# Altium PCB PowerProtect.PcbDoc
Units mil, origin at the board's own origin, x right, y up, seen from the top; angles counter-clockwise.
Board outline 6000 x 4000 mil, 2 copper layers (Top Layer, Bottom Layer); 20 components, 16 nets, 53 pads, 4 vias.
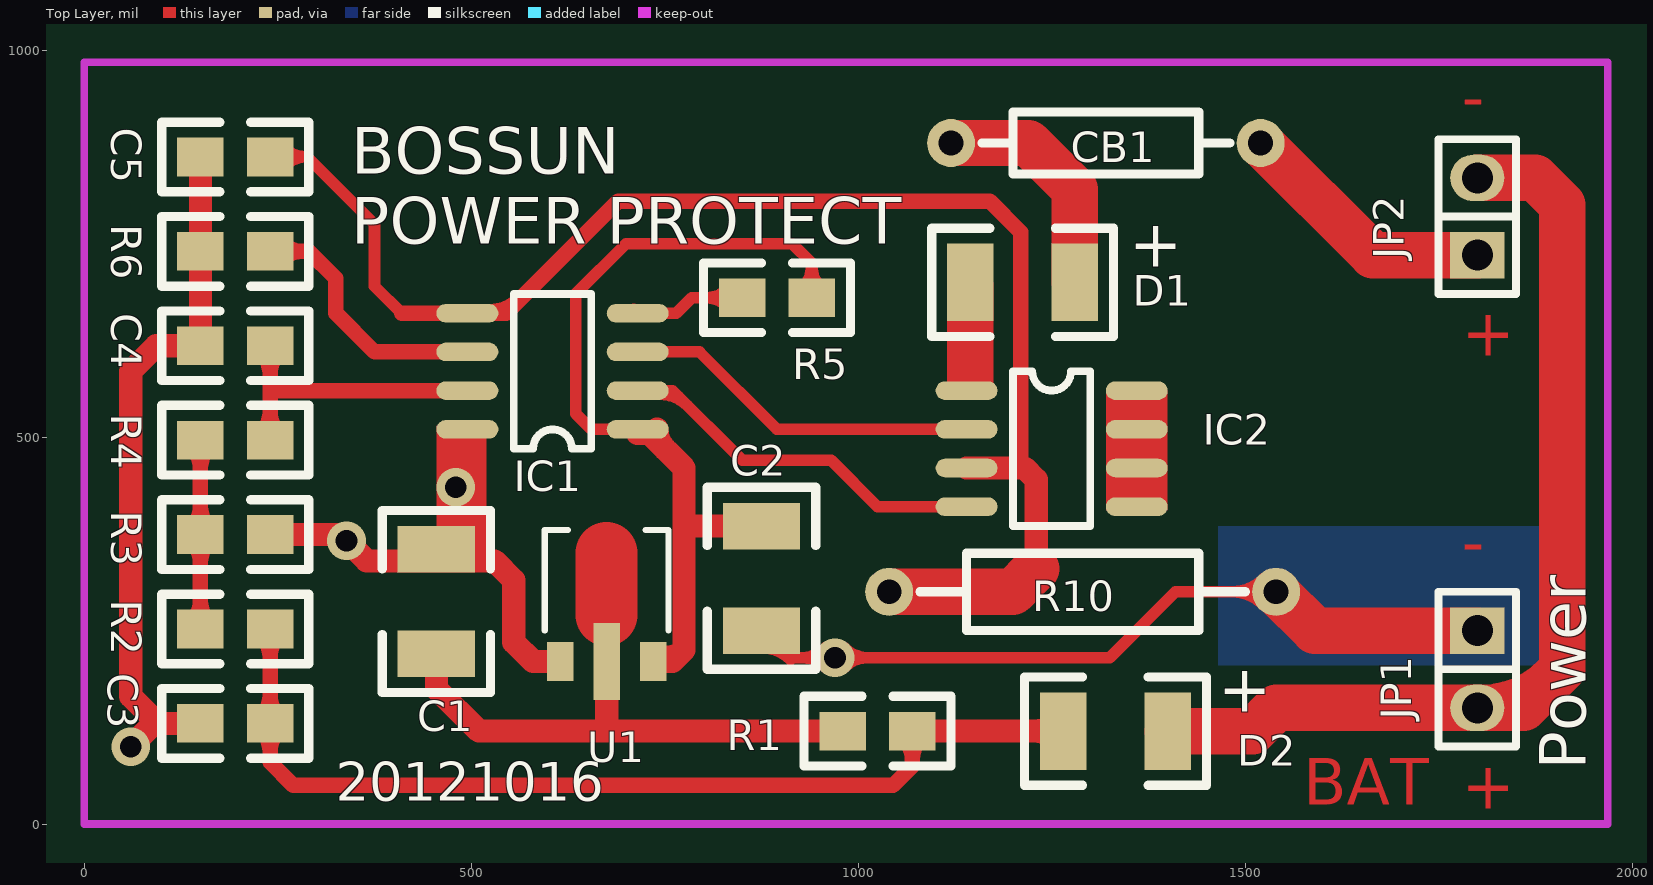
[diagram p0: Top Layer view]
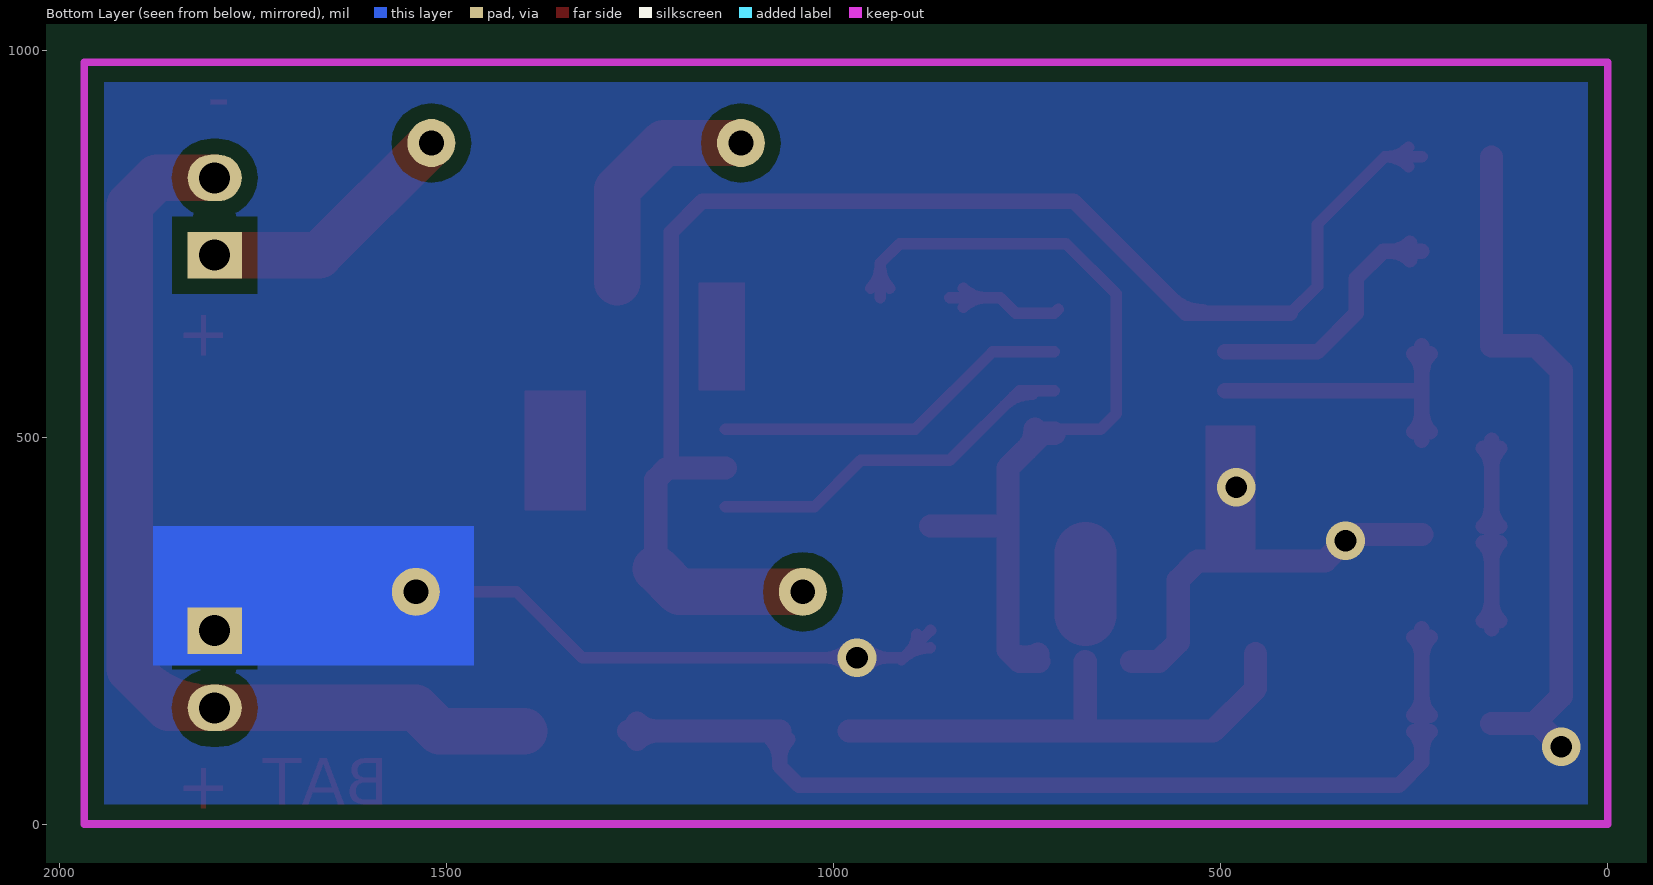
[diagram p1: Bottom Layer view, seen from below]

## Layer stack, top to bottom
Top Layer: signal copper 1.4
Dielectric: dielectric 12.6, FR-4, Dk 4.8
Bottom Layer: signal copper 1.4

## Board outline
-900,-700 5100,-700 5100,3300 -900,3300

## Design rules (kind name [scope] priority, off if disabled: settings)
Clearance Clearance_1 [(InPolygon)] p1: gap=20
Clearance [All] p2: gap=10
ComponentClearance [All] p1: gap=10 collisioncheckmode=0
PolygonConnect [All] p1: connectstyle=Relief reliefconductorwidth=10 reliefentries=4 polygonreliefangle="90 Angle"
RoutingVias [All] p1: holewidth=28 width=50 viastyle="Through Hole" minholewidth=28 minwidth=50 maxholewidth=28 maxwidth=50
SolderMaskExpansion [All] p1: expansion=4
TestPointUsage [All] p1: valid=0 allowmultiple=FALSE
Testpoint [All] p1: side=15 testpointundercomponent=TRUE minsize=40 maxsize=100 preferedsize=60 minholesize=0 maxholesize=40 preferedholesize=32 testpointgrid=1 style=1023 order=-539222988
Width [All] p1: maxlimit=1000 minlimit=10 preferedwidth=10 toplayer_prefwidth=30 minimp=50.000000 maximp=50.000000 favimp=50.000000
17 further rules are at their usual default settings.

## Components (designator, comment, footprint, x,y, rotation, side; value= is the part's Value field where it differs from the comment)
C1 "Cap" 1210 455,355 r270 top
C2 "Cap" 1210 875,250 r90 top
C3 "Cap" 0805 150,130 r0 top
C4 "Cap" 0805 150,618 r0 top
C5 "Cap" 0805 150,862 r0 top
CB1 "Fuse 2" AXIAL0.4 1120,880 r0 top
D1 "SS14" 1210 1280,700 r180 top
D2 "1n4148" 1210 1400,120 r180 top
IC1 "PIC12F1822" so-8 715,510 r180 top
IC2 "IRF8910" so-8 1140,560 r0 top
JP1 "PW" sip2 1800,250 r270 top
JP2 "RL" sip2 1800,735 r90 top
R1 "Res2" 0805 980,120 r0 top
R2 "Res2" 0805 150,252 r0 top
R3 "Res2" 0805 150,374 r0 top
R4 "Res2" 0805 150,496 r0 top
R5 "Res2" 0805 940,680 r180 top
R6 "100K" 0805 150,740 r0 top
R10 "Res2" AXIAL0.5 1040,300 r0 top
U1 "ME6201_33" SOT-89 615,210 r0 top

## Footprints (in the part's own frame and the unit in brackets; to place one, negate y for a bottom-side part, rotate by r counter-clockwise, add the part's x,y. Pads: shape width x height; smd on the part's side, far side on the other; paste and mask are expansions set on the pad)
0805 [mil]
  rect 60x50 smd: 1(0,0) 2(90,0)
  silkscreen extent -50,-45 140,45
1210 [mil]
  rect 60x100 smd: 1(0,0) 2(135,0)
  silkscreen extent -50,-70 185,70
AXIAL0.4 [mil]
  round 62 hole 32: 1(0,0) 2(400,0)
  silkscreen extent 40,-40 360,40
AXIAL0.5 [mil]
  round 62 hole 32: 1(0,0) 2(500,0)
  silkscreen extent 40,-50 460,50
sip2 [mil]
  rect 60x70 hole 40: 1(0,0)
  oval 60x70 hole 40: 2(100,0)
  silkscreen extent -50,-50 150,50
so-8 [mil]
  oval 80x24 smd: 1(0,0) 2(0,-50) 3(0,-100) 4(0,-150) 5(220,-150) 6(220,-100) 7(220,-50) 8(220,0)
  silkscreen extent 60,-175 160,25
SOT-89 [mil]
  rect 34x50 smd: 1(0,0) 3(120,0)
  rect 34x100 smd: 2(60,0)
  Top Layer lines w80: 60,60 60,140
  silkscreen extent -20,40 140,170

## Part data
C1 C2 C3 C4 C5: "Capacitor"
CB1: "Fuse"
D1 D2: library part "Diode 1N4007", "1 Amp General Purpose Rectifier"
IC1 IC2: library part "Header 4X2A", "Header, 4-Pin, Dual row"
JP1 JP2: library part "Header 2", "Header, 2-Pin"
R1 R2 R3 R4 R5 R10: "Resistor"
R6: library part Res2, "Resistor"
U1: library part "Header 3", "Header, 3-Pin"

## Via types
v1: diameter 50, hole 28, Top Layer to Bottom Layer, 4 vias

## Nets (pads, with @x,y where several pads share a name; then routed paths per layer and width w, separated by ;. In a path a pad name is that pad's centre, name@x,y a point inside that pad or via, vN(x,y) a via of type N, cw(c..) or ccw(c..) an arc to the next point about the centre after c; other vN are vias at no path point)
GND: C1.1 C2.1 C3.1 C4.1 C5.1 IC1.8 JP1.1 R3.2 R6.1 R10.2 U1.1 | length 2691.5
  Top Layer w15: C2.1 910,215 1325,215 1410,300 R10.2 ; C2.1@875.32,227.5 cw(c876.26,176.26) 912.5,212.5 ; C2.1@892.5,245 ccw(c922.68,245) C2.1@901.34,223.66 ; v1@957.63,202.63 ccw(c927.75,172.75) 927.75,215 ccw(c927.75,257.25) v1@957.63,227.37 ; v1@982.37,202.63 cw(c1012.25,172.75) 1012.25,215 cw(c1012.25,257.25) v1@982.37,227.37 ; R10.2@1523.38,283.38 ccw(c1483.27,243.27) 1483.27,300 ccw(c1483.27,356.73) R10.2@1523.38,316.62
  Top Layer w30: v1(60,100) 90,130 C3.1 ; 95,130 60,165 60,585 93,618 C4.1 C5.1 ; R3.2 331,374 365,340 530,340 555,315 555,235 580,210 U1.1
  Top Layer w60: R10.2 1590,250 JP1.1
  other v1: 970,215 338.87,366.13 480,435
NetC1_2: C1.2 R1.1 U1.2 | length 682.8
  Top Layer w30: C1.2 455,175 510,120 R1.1 ; 675,120 U1.2
NetC2_2: C2.2 IC1.1 R5.1 U1.3 | length 1227.5
  Top Layer w15: IC1.1 655,510 635,530 635,685 700,750 915,750 940,725 R5.1 ; R5.1@927.63,692.37 ccw(c897.75,722.25) 940,722.25 ccw(c982.25,722.25) R5.1@952.37,692.37
  Top Layer w30: IC1.1@715,505 730,505 775,460 775,225 ; U1.3 760,210 775,225 ; U1.3@735.99,219.74 ccw(c752.04,247.95) 775,225 ; IC1.1@740,510 ccw(c776.21,510) 750.61,484.39 ; 775,385 C2.2
NetC3_2: C3.2 D2.2 R1.2 R2.2 | length 1549.2
  Top Layer w20: C3.2@229.39,119.39 cw(c203.79,93.79) 240,93.79 cw(c276.21,93.79) C3.2@250.61,119.39 ; C3.2@229.39,140.61 ccw(c203.79,166.21) 240,166.21 ccw(c276.21,166.21) C3.2@250.61,140.61 ; R2.2@229.39,241.39 cw(c203.79,215.79) 240,215.79 cw(c276.21,215.79) R2.2@250.61,241.39 ; R2.2 240,80 270,50 1045,50 1070,75 R1.2 ; R1.2@1059.39,109.39 cw(c1033.79,83.79) 1070,83.79 cw(c1106.21,83.79) R1.2@1080.61,109.39
  Top Layer w30: R1.2 D2.2 ; D2.2@1254.39,109.39 ccw(c1228.79,83.79) 1228.79,120 ccw(c1228.79,156.21) D2.2@1254.39,130.61
NetC4_2: C4.2 IC1.7 R4.2 | length 490.8
  Top Layer w20: R4.2@229.39,506.61 ccw(c203.79,532.21) 240,532.21 ccw(c276.21,532.21) R4.2@250.61,506.61 ; C4.2@229.39,607.39 cw(c203.79,581.79) 240,581.79 cw(c276.21,581.79) C4.2@250.61,607.39 ; R4.2 C4.2 ; 240,560 IC1.7
NetC5_2: C5.2 IC1.5 IC2.3 R10.1 | length 2013.9
  Top Layer w15: C5.2 288,862 375,775 375,695 410,660 ; C5.2@257.37,849.63 cw(c287.25,819.75) 287.25,862 cw(c287.25,904.25) C5.2@257.37,874.37 ; 1195,460 1210,475
  Top Layer w20: 410,660 545,660 690,805 1170,805 1210,765 1210,475 ; IC1.5@523,662 ccw(c523,719.94) 563.97,678.97
  Top Layer w30: IC2.3 1215,460 1230,445 1230,330
  Top Layer w60: R10.1 1200,300 1230,330
NetCB1_1: CB1.1 D1.1 | length 304.9
  Top Layer w60: CB1.1 1220,880 1280,820 D1.1
NetCB1_2: CB1.2 JP2.1 | length 340.1
  Top Layer w60: CB1.2 1665,735 JP2.1
NetD1_2: D1.2 IC2.1
NetD2_1: D2.1 JP1.2 JP2.2 | length 1371.9
  Top Layer w60: D2.1 1510,120 1540,150 1860,150 1910,200 1910,800 1875,835 JP2.2 ; JP1.2@1805,150 ccw(c1805,282.78) 1898.89,188.89
NetIC1_2: IC1.2 IC2.4 | length 553.5
  Top Layer w15: IC1.2 760,560 850,470 965,470 1025,410 IC2.4 ; IC1.2@743,555.5 cw(c743,503.59) 779.7,540.3 ; IC1.2@744.83,555.89 cw(c753.47,536.47) 768.5,551.5
NetIC1_3: IC1.3 IC2.2 | length 466.4
  Top Layer w15: IC1.3 795,610 895,510 IC2.2
NetIC1_4: IC1.4 R5.2 | length 216.7
  Top Layer w15: IC1.4@710,665 IC1.4 765,660 785,680 R5.2 ; R5.2@832.63,667.63 ccw(c802.75,637.75) 802.75,680 ccw(c802.75,722.25) R5.2@832.63,692.37
NetIC1_6: IC1.6 R6.2 | length 392.1
  Top Layer w20: R6.2 290,740 325,705 325,660 375,610 IC1.6 ; R6.2@255.61,729.39 cw(c281.21,703.79) 281.21,740 cw(c281.21,776.21) R6.2@255.61,750.61
NetIC2_5: IC2.5 IC2.6 IC2.7 IC2.8
NetR2_1: R2.1 R3.1 R4.1 | length 471.5
  Top Layer w20: R2.1@139.39,262.61 ccw(c113.79,288.21) 150,288.21 ccw(c186.21,288.21) R2.1@160.61,262.61 ; R3.1@139.39,363.39 cw(c113.79,337.79) 150,337.79 cw(c186.21,337.79) R3.1@160.61,363.39 ; R3.1@139.39,384.61 ccw(c113.79,410.21) 150,410.21 ccw(c186.21,410.21) R3.1@160.61,384.61 ; R4.1@139.39,485.39 cw(c113.79,459.79) 150,459.79 cw(c186.21,459.79) R4.1@160.61,485.39 ; R2.1 R4.1

## Polygon pours and split planes (outlines as drawn)
GND on Bottom Layer (solid): 0,985 0,0 1970,0 1970,985

## Keep-outs
Keep-Out Layer:
  lines w10: 0,0 1968.5,0 1968.5,984.25 0,984.25 0,0

## Other copper
Top Layer:
  rectangle net NetIC2_5: 1320,405 1400,560
  rectangle net NetD1_2: 1115,560 1175,700
  rectangle net GND: 455,355 520,515
  text "-" at 1780,910 h60
  text "+" at 1780,605 h60
  text "-" at 1780,335 h60
  text "BAT" at 1575,25 h60
  text "+" at 1780,20 h60
Bottom Layer:
  rectangle net GND: 1465,205 1880,385

## Silkscreen, mask and mechanical layers (free items; w line width, h text height)
Top Overlay:
  text "BOSSUN" at 345,840 h60
  text "POWER PROTECT" at 345,750 h60
  text "+" at 1350,720 h60
  text "+" at 1465,145 h60
  text "Power" at 1940,70 h60 r90
  text "20121016" at 325,30 h50